# Allegro board PCB-00001382-001-V.B-0127-FAB.brd
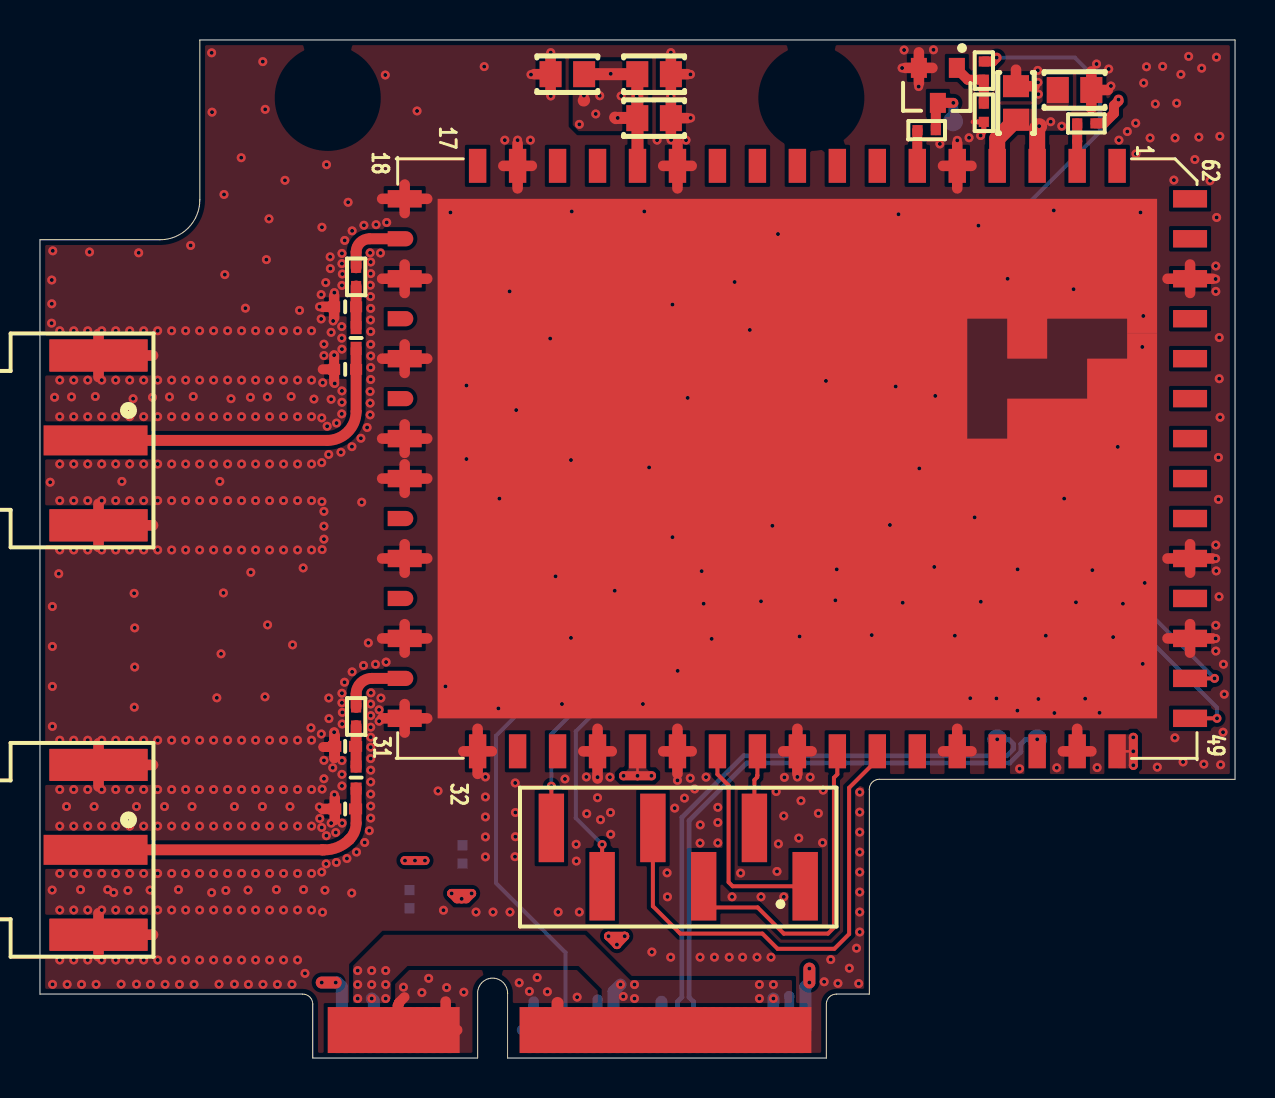
[diagram p0: board, top side]
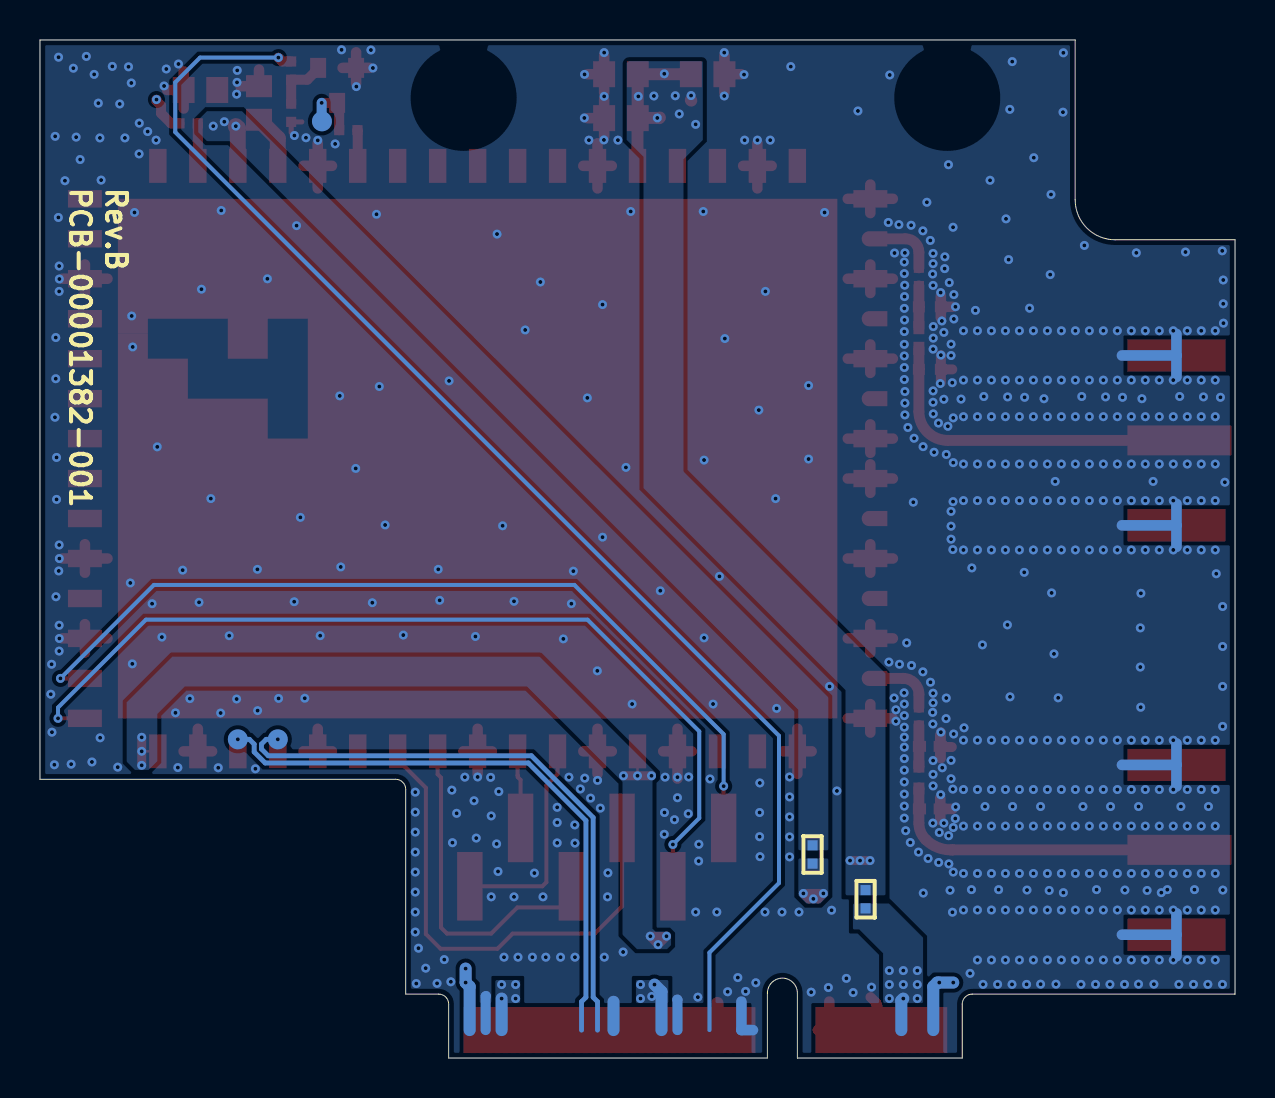
[diagram p1: board, bottom side, seen from below]

Outline 59.8 x 50.95 mm; copper layers: TOP, GND1, GND2, BOTTOM. Coordinates in mm from the lower left corner of the outline.
Outline path: 0,40.95 6,40.95 arc(7.41,41.54) 8,42.95 8,50.95 59.8,50.95 59.8,13.95 42,13.95 arc(41.65,13.8) 41.5,13.45 41.5,3.2 39.85,3.2 arc(39.5,3.05) 39.35,2.7 39.35,0 23.4,0 23.4,3.25 arc(22.65,4) 21.9,3.25 21.9,0 13.65,0 13.65,2.7 arc(13.5,3.05) 13.15,3.2 0,3.2 0,40.95

## Design rules (mm)
net group USB_LINES: nets M_USB_D_N TO P36 M_USB_D_P TO P38

## Placement (name value [footprint] x y rotation side)
C1  0.3pF  [C0402]  15.82 14.04 270 top
C15  47uF  [C0805]  48.84 47.8 90 top
C16  47uF  [C0805]  51.77 48.45 0 top
C17  47uF  [C0805]  26.39 49.24 180 top
C18  47uF  [C0805]  30.73 49.24 0 top
C19  0.1uF  [C0805]  30.73 47.04 0 top
C20  47uF  [C0402]  15.27 37.6 180 top
C21  47uF  [C0402]  15.27 34.47 180 top
J1  PCIe Egde  [MINI_PCI_MOLEX]  22.65 1.4 0 top
J2  SMA 142-0701-801  [TH_062_SMA]  2.93 30.91 270 top
J3  SMA 142-0701-801  [TH_062_SMA]  2.93 10.42 270 top
J4  6 x 0.1"  [CONN-6-SMT-100MIL]  31.94 10.06 180 top
L1  2.2nH  [L0402]  15.82 36.04 270 top
L2  0.8nH  [L0402]  15.27 15.6 0 top
L3  Load 0 Ohm R  [L0402]  15.27 12.47 0 top
NOREF  -  []  22.68 4 0 top
NOREF#2  -  []  13.65 0 90 top
NOREF#3  -  []  0 3.2 0 top
NOREF#4  -  []  41.64 13.8 0 top
NOREF#5  -  []  -151.59 -123.07 0 top
NOREF#6  -  []  -37.11 -67.94 0 top
NOREF#7  -  []  39.35 0 0 top
NOREF#8  -  []  -31.36 -69.15 0 top
NOREF#9  -  []  0 40.95 0 top
Q1  IRLML2402  [SOT23T02]  44.93 48.68 180 top
R1  0  [R0402]  52.36 46.78 180 top
R3  100K  [R0402]  47.23 47.31 270 top
R4  DNS  [R0402]  44.37 46.44 180 top
R5  0  [R0402]  47.23 49.42 270 top
R7  0  [R0402]  15.82 17.09 270 top
R8  0  [R0402]  15.82 39.09 270 top
R9  0  [R0402]  21.14 10.19 90 bottom
R10  0  [R0402]  18.49 7.95 270 bottom
TP04  -  [TP]  45.69 46.88 180 bottom
TP5  -  [TP]  49.9 15.95 180 bottom
TP6  -  [TP]  47.9 15.95 180 bottom
U1  MK5  [MK5_COHDA]  37.9 30 270 top

## Library data of the parts
C1 = Cap 1206 10uf 35V Cer: User Part Number: pn
C15-C19 = Cap 1206 10uf 35V Cer
C20 C21 = Cap 0402 2.4pf NPO Cer: User Part Number: pn
J1 = PCIe Egde
J2 J3 = RCA JACK_2: User Part Number: pn
J4 = 6 HEADER - 100mil: User Part Number: pn
L1-L3 = INDUCTOR_3: User Part Number: pn
Q1 = IRLML2402: User Part Number: pn
R1 = Res 0402 5% 2.2 OHM 0_3.1W: User Part Number: PN; Tolerance: TOL
R3 = Res 0402 5% 2.2 OHM 0_6.1W: User Part Number: PN; Tolerance: TOL
R4 = Res 0402 5% 2.2 OHM 0_5.1W: User Part Number: PN; Tolerance: TOL
R5 = Res 0402 5% 1 OHM 0_1.1W: User Part Number: PN; Tolerance: TOL
R7 R8 = Res 0402 5% 2.2 OHM 0_1.1W: User Part Number: PN; Tolerance: TOL
R9 R10 = Res 0402 5% 2.2 OHM 0_2.1W: User Part Number: PN; Tolerance: TOL
TP04-TP6 = TP
U1 = MK5_01

## Footprints (pads in the part's own frame, mm; a bottom-side part is the same pattern mirrored in y, then rotated)
C0402
  rect 0.6x0.55 smd: 1(-0.55,0) 2(0.55,0)
C0805
  rect 1.1x1.3 smd: 1(-0.84,0) 2(0.84,0)
CONN-6-SMT-100MIL
  rect 1.27x3.43 smd: 1(-6.35,1.46) 2(-3.81,-1.46) 3(-1.27,1.46) 4(1.27,-1.46) 5(3.81,1.46) 6(6.35,-1.46)
L0402
  rect 0.66x0.55 smd: 1(-0.52,0) 2(0.52,0)
MINI_PCI_MOLEX
  rect 0.6x2.3 smd: 1(-7.95,0) 2(-7.55,0) 3(-7.15,0) 4(-6.75,0) 5(-6.35,0) 6(-5.95,0) 7(-5.55,0) 8(-5.15,0) 9(-4.75,0) 10(-4.35,0) 11(-3.95,0) 12(-3.55,0) 13(-3.15,0) 14(-2.75,0) 15(-2.35,0) 16(-1.95,0) 17(1.65,0) 18(2.05,0) 19(2.45,0) 20(2.85,0) 21(3.25,0) 22(3.65,0) 23(4.05,0) 24(4.45,0) 25(4.85,0) 26(5.25,0) 27(5.65,0) 28(6.05,0) 29(6.45,0) 30(6.85,0) 31(7.25,0) 32(7.65,0) 33(8.05,0) 34(8.45,0) 35(8.85,0) 36(9.25,0) 37(9.65,0) 38(10.05,0) 39(10.45,0) 40(10.85,0) 41(11.25,0) 42(11.65,0) 43(12.05,0) 44(12.45,0) 45(12.85,0) 46(13.25,0) 47(13.65,0) 48(14.05,0) 49(14.45,0) 50(14.85,0) 51(15.25,0) 52(15.65,0)
MK5_COHDA
  rect 1.7x0.87 smd: 1(-14.65,16) 2(-14.65,14) 3(-14.65,12) 4(-14.65,10) 5(-14.65,8) 6(-14.65,6) 7(-14.65,4) 8(-14.65,2) 9(-14.65,0) 10(-14.65,-2) 11(-14.65,-4) 12(-14.65,-6) 13(-14.65,-8) 14(-14.65,-10) 15(-14.65,-12) 16(-14.65,-14) 17(-14.65,-16) 32(14.65,-16) 33(14.65,-14) 34(14.65,-12) 35(14.65,-10) 36(14.65,-8) 37(14.65,-6) 38(14.65,-4) 39(14.65,-2) 40(14.65,0) 41(14.65,2) 42(14.65,4) 43(14.65,6) 44(14.65,8) 45(14.65,10) 46(14.65,12) 47(14.65,14) 48(14.65,16)
  rect 0.87x1.7 smd: 18(-13,-19.65) 20(-9,-19.65) 22(-5,-19.65) 24(-1,-19.65) 25(1,-19.65) 27(5,-19.65) 29(9,-19.65) 31(13,-19.65) 49(13,19.65) 50(11,19.65) 51(9,19.65) 52(7,19.65) 53(5,19.65) 54(3,19.65) 55(1,19.65) 56(-1,19.65) 57(-3,19.65) 58(-5,19.65) 59(-7,19.65) 60(-9,19.65) 61(-11,19.65) 62(-13,19.65)
  custom 0.76x1.28 smd: 19(-11,-19.86) 21(-7,-19.86) 23(-3,-19.86) 26(3,-19.86) 28(7,-19.86) 30(11,-19.86)
  custom 26x36 smd: 63(0,0)
R0402
  rect 0.508x0.508 smd: 1(-0.457,0) 2(0.457,0)
SOT23T02
  rect 0.8x1 smd: 1(-0.95,-0.875) 2(0.95,-0.875) 3(0,0.875)
TH_062_SMA
  rect 1.5x5.2 smd: 1(0,-0.15)
  rect 1.6x4.9 smd: 2(-4.25,0) 3(4.25,0) 4(-4.25,0) 5(4.25,0)
TP
  round 1 smd: 1(0,0)

## Nets
3V3 TO P3,4: J1.2 J1.52 R9.1
5V0 TO P13,36, 48: C17.1 C18.1 C19.1 R10.1 U1.13(5V0_PA1) U1.36(5V0_PA2) U1.48(M_USB_VBUS)
GND: C15.2 C16.2 C17.2 C18.2 C19.2 C20.2 C21.2 J1.9 J1.15 J1.18 J1.21 J1.26 J1.34 J1.50 J2.2(SHIELD) J2.3(SHIELD#3) J2.4(SHIELD#4) J2.5(SHIELD#5) J3.2(SHIELD) J3.3(SHIELD#3) J3.4(SHIELD#4) J3.5(SHIELD#5) L2.1 L3.1 Q1.2(S) R3.2 U1.5 U1.12 U1.16 U1.18 U1.20 U1.22 U1.24 U1.25 U1.27 U1.29 U1.31 U1.32 U1.35 U1.37 U1.40 U1.44 U1.47 U1.51 U1.53 U1.60 U1.63(EXT PAD)
M_USB_D_N TO P36: J1.36 TP6.1 U1.45(M_USB_D_N)
M_USB_D_P TO P38: J1.38 TP5.1 U1.46(M_USB_D_P)
N07266: R1.2 U1.2(M_RST_N)
N07322: C15.1 C16.1 R9.2 U1.3(3V3_DIG1) U1.4(3V3_DIG2)
N15566: C20.1 L1.1 R8.2
N27947: J1.6 J1.28 J1.48 R10.2
N31801: R4.2 U1.6(PS_EN)
N32888: J1.22 R5.1
N35447: Q1.3(D) R1.1 R4.1 TP04.1
N42992: J4.1 U1.38(M_SPI_MOSI)
N43002: J4.2 U1.39(M_SPI_SCK)
N43006: J4.3 U1.41(M_SPI_MISO)
N43010: J4.4 U1.42(M_SPI_CS)
N43018: J4.5 U1.49(UART1_RX)
N43030: J4.6 U1.50(UART1_TX)
N50626: C1.1 L2.2 R7.2
N64658: Q1.1(G) R3.1 R5.2
N72226: R8.1 U1.19(5V0_ANT1)
N72235: R7.1 U1.30(RF5G_ANT2)
N73775: C21.1 J2.1(CENTER) L1.2
N75851: C1.2 J3.1(CENTER) L3.2

Pads without a net: J1 1 3 4 5 7 8 10 11 12 13 14 16 17 19 20 23 24 25 27 29 30 31 32 33 35 37 39 40 41 42 43 44 45 46 47 49 51; U1 1 7 8 9 10 11 14 15 17 21 23 26 28 33 34 43 52 54 55 56 57 58 59 61 62

## Via types
v1: diameter 0.45, hole 0.2, TOP to BOTTOM, 724 vias

## Routing (per net, layer and track width the routed paths; a pad name or vN(x,y) marks a point on that pad's centre or on a via; arc(x,y) is an arc through that point)
3V3 TO P3,4: length 16.1
  TOP w0.45: 21.33,7.97 v1(21.1,7.97) 20.87,7.97 v1(20.6,8.24) v1(21.6,8.24) 21.33,7.97
  TOP w0.6: v1(14.8,3.78) v1(14.1,3.78) ; v1(38.5,4.48) v1(38.5,3.78)
  GND1 w0.6: v1(14.8,3.78) v1(14.1,3.78) ; v1(38.5,3.78) v1(38.5,4.48)
  GND1 w1: 38.5,5.52 v1(38.5,4.48)
  GND2 w0.45: v1(20.6,8.24) 20.87,7.97 v1(21.1,7.97) 21.33,7.97 v1(21.6,8.24) v1(20.6,8.24)
  GND2 w0.6: v1(14.8,3.78) v1(14.1,3.78) ; v1(38.5,4.48) v1(38.5,3.78)
  BOTTOM w0.6: v1(38.5,4.48) v1(38.5,3.78) 38.3,3.58 J1.52 ; v1(14.1,3.78) v1(14.8,3.78) 14.9,3.78 15.1,3.58 J1.2
5V0 TO P13,36, 48: length 24.7
  TOP w0.127: U1.36 v1(29.9,14.12) ; U1.48 v1(54.71,15.35)
  TOP w0.2: 29.89,14.13 v1(29.9,14.12)
  TOP w0.45: v1(19.26,9.88) v1(18.76,9.88) v1(18.26,9.88) ; v1(29.2,14.12) v1(29.9,14.12) v1(30.6,14.12) ; v1(54.71,16.05) v1(54.71,15.35) v1(54.71,14.65) ; v1(28.87,5.68) v1(28.45,6.1) v1(29.26,6.1) v1(28.87,5.68)
  TOP w0.6: 28.78,47.07 28.81,47.04 ; 27.21,47.92 27.23,47.94 ; C19.1 C18.1 C17.1 ; C19.1 29.88,47.05 v1(28.91,47.05) ; C19.1 29.9,47.03 U1.13
  GND1 w0.45: v1(54.71,16.05) v1(54.71,15.35) v1(54.71,14.65) ; v1(30.6,14.12) v1(29.9,14.12) v1(29.2,14.12)
  GND2 w0.45: v1(54.71,16.05) v1(54.71,15.35) v1(54.71,14.65) ; v1(30.6,14.12) v1(29.9,14.12) v1(29.2,14.12) ; v1(19.26,9.88) v1(18.76,9.88) v1(18.26,9.88) ; v1(29.26,6.1) v1(28.87,5.68) v1(28.45,6.1) v1(29.26,6.1)
  vias: v1(26.99,46.73) v1(27.22,48.17) v1(27.81,47.25) v1(28.01,48.16) v1(28.56,49.26) v1(29.08,48.15) v1(29.86,48.13)
GND: length 147.2
  TOP w0.254: 47.23,46.32 R3.2 46.7,46.85
  TOP w0.5: C21.2 v1(14.72,35.18) ; C21.2 14.15,34.47 ; C21.2 14.72,33.81 ; 14.17,15.56 14.69,15.56 14.72,15.6 ; 14.72,15.6 14.72,15 ; 14.72,15.6 v1(14.72,16.31) ; J1.9 17.9,2.62 17.95,2.67 17.95,2.74 17.97,2.76 17.97,2.78 18.24,3.05
  TOP w0.527: J3.2 2.93,15.75 ; J3.2 2.93,13.59 ; J3.2 5.66,14.67 ; C19.2 31.57,47.96 ; C19.2 32.4,47.04 ; C19.2 31.57,46.11 ; 14.75,16.15 L2.1 14.75,15.04 ; U1.16 24.61,44.65 ; U1.16 23.19,44.65 ; U1.16 23.9,45.78 ; U1.16 23.9,43.52 ; J2.2 2.93,36.24 ; J2.2 5.66,35.16 ; J2.2 2.93,34.08 ; U1.51 57.55,21.71 ; U1.51 57.55,20.29 ; U1.51 56.42,21 ; U1.51 58.68,21 ; 14.14,12.47 L3.1 ; L3.1 14.75,11.91 ; L3.1 14.75,13.02 ; U1.40 37.9,16.48 ; U1.40 37.19,15.35 ; U1.40 37.9,14.22 ; U1.40 38.61,15.35 ; 17.12,43 U1.18 ; U1.18 19.38,43 ; U1.18 18.25,42.29 ; U1.18 18.25,43.71 ; 2.93,25.58 J2.3 ; J2.3 5.66,26.66 ; J2.3 2.93,27.74 ; 18.25,20.29 U1.29 ; U1.29 19.38,21 ; U1.29 17.12,21 ; U1.29 18.25,21.71 ; 17.12,25 U1.27 ; U1.27 19.38,25 ; U1.27 18.25,24.29 ; U1.27 18.25,25.71 ; 17.12,29 U1.25 ; U1.25 18.25,28.29 ; U1.25 18.25,29.71 ; U1.25 19.38,29 ; C16.2 52.61,49.37 ; C16.2 52.61,47.52 ; C16.2 53.44,48.45 ; U1.31 19.38,17 ; U1.31 18.25,16.29 ; U1.31 18.25,17.71 ; U1.31 17.12,17 ; U1.32 22.61,15.35 ; U1.32 21.19,15.35 ; U1.32 21.9,14.22 ; U1.32 21.9,16.48 ; 57.55,24.29 U1.53 ; U1.53 57.55,25.71 ; U1.53 56.42,25 ; U1.53 58.68,25 ; U1.35 28.61,15.35 ; U1.35 27.9,16.48 ; U1.35 27.19,15.35 ; U1.35 v1(27.9,14.06) 27.9,13.99 ; 57.55,38.29 U1.60 ; U1.60 56.42,39 ; U1.60 58.68,39 ; U1.60 57.55,39.71 ; 18.25,34.29 U1.22 ; U1.22 18.25,35.71 ; U1.22 17.12,35 ; U1.22 19.38,35 ; 31.57,48.31 C18.2 ; C18.2 32.4,49.24 ; C18.2 31.57,50.16 ; 31.9,14.22 U1.37 ; U1.37 31.9,16.48 ; U1.37 32.61,15.35 ; U1.37 31.19,15.35 ; U1.12 31.9,45.78 ; U1.12 31.9,43.52 ; U1.12 32.61,44.65 ; U1.12 31.19,44.65 ; U1.20 19.38,39 ; U1.20 18.25,39.71 ; U1.20 18.25,38.29 ; U1.20 17.12,39 ; C20.2 14.72,38.15 ; C20.2 14.72,37.04 ; C20.2 14.14,37.6 ; 20.25,23.34 20.3,23.34 ; U1.24 19.38,31 ; U1.24 18.25,31.71 ; U1.24 18.25,30.29 ; U1.24 17.12,31 ; 45.9,43.52 U1.5 ; U1.5 45.9,45.78 ; U1.5 46.61,44.65 ; U1.5 45.19,44.65 ; U1.47 52.61,15.35 ; U1.47 51.19,15.35 ; U1.47 51.9,16.48 ; 43.3,49.55 Q1.2 ; Q1.2 44.66,49.55 ; Q1.2 43.98,50.33 ; Q1.2 43.98,48.78 ; 49.77,48.64 C15.2 48.84,49.46 ; J3.3 2.93,7.25 ; J3.3 5.66,6.17 ; J3.3 2.93,5.09 ; C17.2 25.55,50.16 ; C17.2 25.55,48.31 ; C17.2 24.72,49.24 ; 20.3,2.83 J1.15 20.88,1.4 ; 45.19,15.35 U1.44 ; U1.44 45.9,16.48 ; U1.44 46.61,15.35
  TOP w0.6: J1.21 25.9,2.76
  BOTTOM w0.5: 27.91,2.93 27.9,2.92 J1.26 ; J1.50 37.5,3.09 37.48,3.11
  BOTTOM w0.527: J2.2 5.66,35.16 ; J2.2 2.93,36.24 ; J2.2 2.93,34.08 ; J3.2 5.66,14.67 ; J3.2 2.93,13.59 ; J3.2 2.93,15.75 ; J2.3 2.93,27.74 ; J2.3 2.93,25.58 ; J2.3 5.66,26.66 ; 2.93,5.09 J3.3 ; J3.3 2.93,7.25 ; J3.3 5.66,6.17 ; 24.12,1.4 J1.18 24.7,2.83
  BOTTOM w0.6: J1.34 31.1,2.82
  vias: v1(0.51,28.82) v1(0.59,38.94) v1(0.59,37.75) v1(0.58,36.78) v1(0.62,22.6) v1(0.62,20.6) v1(0.62,18.6) v1(0.62,16.6) v1(0.61,8.41) v1(0.64,40.4) v1(0.63,3.69) v1(0.73,33.07) v1(0.99,36.4) v1(0.99,33.93) v1(0.99,32.1) v1(0.99,29.73) v1(0.99,27.9) v1(0.99,25.43) v1(0.94,24.24) v1(0.99,15.91) v1(0.99,13.44) v1(0.99,11.61) v1(0.99,9.24) v1(0.99,7.41) v1(0.99,4.91) v1(1.33,12.59) v1(1.36,3.69) v1(1.58,33.09) v1(1.69,36.4) v1(1.69,33.93) v1(1.69,32.1) v1(1.69,29.73) v1(1.69,27.9) v1(1.69,25.43) v1(1.69,15.91) v1(1.69,13.44) v1(1.69,11.61) v1(1.69,9.24) v1(1.69,7.41) v1(1.69,4.91) v1(2.03,8.43) v1(2.08,3.69) v1(2.39,36.4) v1(2.39,33.93) v1(2.39,32.1) v1(2.39,29.73) v1(2.39,27.9) v1(2.39,25.43) v1(2.39,15.91) v1(2.39,13.44) v1(2.39,11.61) v1(2.39,9.24) v1(2.39,7.41) v1(2.39,4.91) v1(2.48,40.34) v1(2.71,12.59) v1(2.77,33.11) v1(2.81,3.69) v1(3.09,36.4) v1(3.09,33.93) v1(3.09,32.1) v1(3.09,29.73) v1(3.09,27.9) v1(3.09,25.43) v1(3.09,15.91) v1(3.09,13.44) v1(3.09,11.61) v1(3.09,9.24) v1(3.09,7.41) v1(3.09,4.91) v1(3.39,8.43) v1(3.69,8.28) v1(3.79,36.4) v1(3.79,33.93) v1(3.79,32.1) v1(3.79,29.73) v1(3.79,27.9) v1(3.79,25.43) v1(3.79,15.91) v1(3.79,13.44) v1(3.79,11.61) v1(3.79,9.24) v1(3.79,7.41) v1(3.79,4.91) v1(4.1,28.86) v1(4.06,3.7) v1(4.4,8.39) v1(4.49,36.4) v1(4.49,33.93) v1(4.49,32.1) v1(4.49,29.73) v1(4.49,27.9) v1(4.49,25.43) v1(4.49,15.91) v1(4.49,13.44) v1(4.49,11.61) v1(4.49,9.24) v1(4.49,7.41) v1(4.49,4.91) v1(4.66,33) v1(4.71,23.26) v1(4.74,21.53) v1(4.74,19.57) v1(4.72,17.56) v1(4.83,12.59) v1(4.83,3.7) v1(4.94,40.3) v1(5.19,36.4) v1(5.19,33.93) v1(5.19,32.1) v1(5.19,29.73) v1(5.19,27.9) v1(5.19,25.43) v1(5.19,15.91) v1(5.19,13.44) v1(5.19,11.61) v1(5.19,9.24) v1(5.19,7.41) v1(5.19,4.91) v1(5.51,8.41) v1(5.53,3.69) v1(5.63,33.07) v1(5.89,36.4) v1(5.89,33.93) v1(5.89,32.1) v1(5.89,29.73) v1(5.89,27.9) v1(5.89,25.43) v1(5.89,15.91) v1(5.89,13.44) v1(5.89,11.61) v1(5.89,9.24) v1(5.89,7.41) v1(5.89,4.91) v1(6.23,12.59) v1(6.26,3.69) v1(6.48,33.09) v1(6.59,36.4) v1(6.59,33.93) v1(6.59,32.1) v1(6.59,29.73) v1(6.59,27.9) v1(6.59,25.43) v1(6.59,15.91) v1(6.59,13.44) v1(6.59,11.61) v1(6.59,9.24) v1(6.59,7.41) v1(6.59,4.91) v1(6.93,8.43) v1(6.98,3.69) v1(7.29,36.4) v1(7.29,33.93) v1(7.29,32.1) v1(7.29,29.73) v1(7.29,27.9) v1(7.29,25.43) v1(7.29,15.91) v1(7.29,13.44) v1(7.29,11.61) v1(7.29,9.24) v1(7.29,7.41) v1(7.29,4.91) v1(7.54,40.67) v1(7.61,12.59) v1(7.67,33.11) v1(7.71,3.69) v1(7.99,36.4) v1(7.99,33.93) v1(7.99,32.1) v1(7.99,29.73) v1(7.99,27.9) v1(7.99,25.43) v1(7.99,15.91) v1(7.99,13.44) v1(7.99,11.61) v1(7.99,9.24) v1(7.99,7.41) v1(7.99,4.91) v1(8.59,50.31) v1(8.61,47.34) v1(8.59,8.28) v1(8.69,36.4) v1(8.69,33.93) v1(8.69,32.1) v1(8.69,29.73) v1(8.69,27.9) v1(8.69,25.43) v1(8.69,15.91) v1(8.69,13.44) v1(8.69,11.61) v1(8.69,9.24) v1(8.69,7.41) v1(8.69,4.91) v1(8.85,18.03) v1(9,28.86) v1(8.96,3.7) v1(9.06,20.23) v1(9.21,43.22) v1(9.18,23.28) v1(9.25,39.21) v1(9.3,8.39) v1(9.39,36.4) v1(9.39,33.93) v1(9.39,32.1) v1(9.39,29.73) v1(9.39,27.9) v1(9.39,25.43) v1(9.39,15.91) v1(9.39,13.44) v1(9.39,11.61) v1(9.39,9.24) v1(9.39,7.41) v1(9.39,4.91) v1(9.56,33) v1(9.73,12.59) v1(9.73,3.7) v1(10.07,45.06) v1(10.09,36.4) v1(10.09,33.93) v1(10.09,32.1) v1(10.09,29.73) v1(10.09,27.9) v1(10.09,25.43) v1(10.09,15.91) v1(10.09,13.44) v1(10.09,11.61) v1(10.09,9.24) v1(10.09,7.41) v1(10.09,4.91) v1(10.28,37.53) v1(10.41,8.41) v1(10.43,3.69) v1(10.53,33.07) v1(10.55,24.31) v1(10.79,36.4) v1(10.79,33.93) v1(10.79,32.1) v1(10.79,29.73) v1(10.79,27.9) v1(10.79,25.43) v1(10.79,15.91) v1(10.79,13.44) v1(10.79,11.61) v1(10.79,9.24) v1(10.79,7.41) v1(10.79,4.91) v1(11.15,49.87) v1(11.13,12.59) v1(11.16,3.69) v1(11.27,47.48) v1(11.26,18.08) v1(11.33,39.96) v1(11.38,33.09) v1(11.39,21.68) v1(11.46,42) v1(11.49,36.4) v1(11.49,33.93) v1(11.49,32.1) v1(11.49,29.73) v1(11.49,27.9) v1(11.49,25.43) v1(11.49,15.91) v1(11.49,13.44) v1(11.49,11.61) v1(11.49,9.24) v1(11.49,7.41) v1(11.49,4.91) v1(11.83,8.43) v1(11.88,3.69) v1(12.19,36.4) v1(12.19,33.93) v1(12.19,32.1) v1(12.19,29.73) v1(12.19,27.9) v1(12.19,25.43) v1(12.19,15.91) v1(12.19,13.44) v1(12.19,11.61) v1(12.19,9.24) v1(12.19,7.41) v1(12.19,4.91) v1(12.26,43.93) v1(12.51,12.59) v1(12.57,33.11) v1(12.61,3.69) v1(12.64,20.68) v1(12.89,36.4) v1(12.89,33.93) v1(12.89,32.1) v1(12.89,29.73) v1(12.89,27.9) v1(12.89,25.43) v1(12.89,15.91) v1(12.89,13.44) v1(12.89,11.61) v1(12.89,9.24) v1(12.89,7.41) v1(12.89,4.91) v1(12.99,37.42) v1(13.17,24.53) v1(13.19,8.43) v1(13.26,4.24) v1(13.59,36.4) v1(13.59,33.93) v1(13.59,32.1) v1(13.59,29.73) v1(13.59,27.9) v1(13.59,25.43) v1(13.56,16.53) v1(13.59,15.91) v1(13.59,13.44) v1(13.59,11.61) v1(13.59,9.24) v1(13.59,7.41) v1(13.71,32.98) v1(13.99,37.6) v1(13.98,12.57) v1(14,11.99) v1(14.11,41.58) v1(14.07,38.21) v1(14.07,36.99) v1(14.1,32.04) v1(14.1,29.8) v1(14.11,27.85) v1(14.12,25.45) v1(14.08,16.22) v1(14.12,13.46) v1(14.1,11.54) v1(14.1,9.31) v1(14.21,35.73) v1(14.21,35.16) v1(14.15,33.8) v1(14.21,27.36) v1(14.21,26.62) v1(14.21,25.97) v1(14.21,14.9) v1(14.21,13.98) v1(14.14,7.3) v1(14.3,38.81) v1(14.26,8.4) v1(14.34,44.71) v1(14.37,31.62) v1(14.33,11.13) v1(14.32,9.72) v1(14.52,40.1) v1(14.45,30.21) v1(14.45,18.02) v1(14.46,16.99) v1(14.53,39.51) v1(14.57,36.32) v1(14.57,32.97) v1(14.57,11.76) v1(14.67,36.89) v1(14.65,14.53) v1(14.73,38.31) v1(14.75,33.76) v1(14.73,13.18) v1(14.8,11.29) v1(14.84,31.78) v1(14.83,9.79) v1(15.11,40.27) v1(15.11,39.76) v1(15.11,38.67) v1(15.1,36.61) v1(15.1,36.03) v1(15.11,35.48) v1(15.11,33.39) v1(15.11,32.82) v1(15.1,32.24) v1(15.06,30.32) v1(15.11,18.26) v1(15.11,17.78) v1(15.12,16.72) v1(15.11,14.89) v1(15.11,14.2) v1(15.11,13.62) v1(15.12,11.76) v1(15.13,39.24) v1(15.13,17.3) v1(15.25,40.92) v1(15.24,18.81) v1(15.36,9.99) v1(15.42,42.83) v1(15.62,41.4) v1(15.61,30.6) v1(15.62,19.33) v1(15.6,8.26) v1(15.84,10.31) v1(16.06,31.02) v1(16.1,27.82) v1(16.21,41.68) v1(16.19,19.65) v1(16.25,10.79) v1(16.37,31.56) v1(16.52,40.3) v1(16.52,33.36) v1(16.52,32.78) v1(16.52,32.19) v1(16.43,20.78) v1(16.48,11.38) v1(16.55,39.84) v1(16.55,39.26) v1(16.53,38.68) v1(16.54,38.11) v1(16.55,37.52) v1(16.54,36.94) v1(16.55,36.36) v1(16.55,35.72) v1(16.55,35.14) v1(16.55,34.56) v1(16.55,33.96) v1(16.56,18.28) v1(16.55,17.72) v1(16.55,17.14) v1(16.55,16.56) v1(16.55,16.06) v1(16.55,15.56) v1(16.55,14.99) v1(16.55,14.41) v1(16.55,13.82) v1(16.55,13.21) v1(16.55,12.61) v1(16.55,12.01) v1(16.79,19.71) v1(16.82,41.71) v1(16.97,17.43) v1(16.97,16.86) v1(17.04,40.29) v1(17.06,18.02) v1(17.28,49.2) v1(17.35,41.82) v1(17.32,19.82) v1(18.19,3.55) v1(18.87,47.4) v1(19.11,3.28) v1(19.45,3.99) v1(19.92,13.37) v1(20.19,7.4) v1(20.29,18.6) v1(20.35,3.53) v1(20.54,42.32) v1(21.21,3.3) v1(21.34,33.66) v1(21.34,29.98) v1(21.82,7.31) v1(22.23,49.62) v1(22.29,14.07) v1(22.29,13.07) v1(22.29,12.07) v1(22.29,11.07) v1(22.29,10.07) v1(22.67,7.31) v1(22.99,28) v1(22.94,17.5) v1(23.26,45.94) v1(23.5,38.37) v1(23.52,7.31) v1(23.78,13.77) v1(23.79,12.29) v1(23.79,11.08) v1(23.77,10.08) v1(23.9,45.94) v1(23.83,32.43) v1(23.98,3.77) v1(24.49,3.34) v1(24.57,49.22) v1(24.54,45.94) v1(24.88,4.03) v1(25.39,3.32) v1(25.56,50.32) v1(25.56,48.15) v1(25.53,36.01) v1(25.8,24.11) v1(25.93,7.31) v1(26.12,17.72) v1(26.27,13.97) v1(26.61,42.37) v1(26.57,29.93) v1(26.57,21.03) v1(26.83,10.7) v1(26.84,9.86) v1(26.88,3.05) v1(26.99,7.31) v1(27.34,14.07) v1(27.36,12.23) v1(27.9,13.03) v1(28.05,11.93) v1(28.52,14.06) v1(28.55,12.29) v1(28.56,11.2) v1(28.76,23.39) v1(30.17,17.72) v1(30.24,42.37) v1(30.48,29.56) v1(30.62,5.31) v1(30.88,45.94) v1(31.38,9.27) v1(31.4,8.07) v1(31.57,50.32) v1(31.57,48.13) v1(31.58,45.95) v1(31.56,5.05) v1(31.65,37.71) v1(31.65,26.07) v1(31.76,12.51) v1(31.91,19.38) v1(31.9,13.9) v1(32.25,13.01) v1(32.33,45.94) v1(32.41,33.04) v1(32.55,49.23) v1(32.56,47.05) v1(32.54,14.01) v1(32.76,13.47) v1(33.11,24.37) v1(33.04,11.67) v1(33.03,10.76) v1(33.03,5.05) v1(33.21,22.74) v1(33.33,14.06) v1(33.61,20.98) v1(33.75,5.05) v1(33.92,12.55) v1(33.92,11.79) v1(33.92,10.77) v1(34.49,5.05) v1(34.63,8.07) v1(34.76,38.84) v1(35.06,9.26) v1(35.16,5.05) v1(35.52,36.44) v1(35.88,5.05) v1(36.08,22.86) v1(36.08,8.07) v1(36.58,5.05) v1(36.65,26.64) v1(36.84,13.34) v1(36.88,9.34) v1(36.93,41.24) v1(36.95,10.72) v1(37.25,14.05) v1(37.22,12.12) v1(37.22,8.07) v1(37.9,14.07) v1(38.01,21.1) v1(37.97,11.01) v1(38.08,12.88) v1(38.54,14.06) v1(38.95,12.25) v1(39.19,13.41) v1(39.16,10.78) v1(39.24,3.82) v1(39.33,33.89) v1(39.57,4.93) v1(39.8,22.91) v1(39.87,24.46) v1(39.93,3.74) v1(40.5,4.5) v1(40.86,5.5) v1(41.02,13.31) v1(41.02,12.31) v1(41.02,11.31) v1(41.02,10.31) v1(41.02,9.31) v1(41.02,8.31) v1(41.02,7.31) v1(41.02,6.31) v1(40.97,3.73) v1(41.62,21.17) v1(42.53,26.68) v1(42.82,33.61) v1(42.96,42.23) v1(43.14,49.55) v1(43.17,22.79) v1(43.24,50.45) v1(43.97,48.62) v1(44,29.51) v1(44.71,50.46) v1(44.8,33.14) v1(44.75,24.58) v1(45.03,45.75) v1(45.78,21.14) v1(45.9,45.93) v1(46.49,46.06) v1(46.55,18.01) v1(46.77,27.06) v1(46.96,41.66) v1(47.07,46.17) v1(47.08,22.84) v1(47.86,18) v1(48.42,39) v1(48.92,24.46) v1(48.91,17.39) v1(49.02,14.48) v1(49.93,49.43) v1(49.94,48.83) v1(49.96,48.24) v1(49.96,17.97) v1(50.33,21.14) v1(50.73,42.42) v1(50.76,17.27) v1(50.88,14.53) v1(51.25,28) v1(51.72,38.48) v1(51.84,22.81) v1(52.3,17.99) v1(52.66,24.42) v1(52.87,49.75) v1(52.9,14.54) v1(53.02,17.28) v1(53.48,49.5) v1(53.59,48.65) v1(53.7,21.07) v1(53.99,45.94) v1(53.93,30.59) v1(54.19,22.74) v1(54.41,46.37) v1(54.83,46.79) v1(54.84,45.25) v1(55.07,42.32) v1(55.21,37.14) v1(55.16,35.59) v1(55.18,19.73) v1(55.23,48.8) v1(55.28,23.78) v1(55.37,49.61) v1(55.55,46.05) v1(55.81,47.75) v1(55.91,14.56) v1(56.18,49.63) v1(56.8,46.05) v1(56.74,43.94) v1(56.79,16.03) v1(56.88,47.79) v1(57.09,49.23) v1(57.2,14.82) v1(57.48,50.13) v1(57.79,44.97) v1(57.99,46.09) v1(58.13,49.54) v1(58.24,14.71) v1(58.55,43.91) v1(58.87,50.09) v1(58.88,42.07) v1(58.84,39.64) v1(58.83,38.99) v1(58.84,38.37) v1(58.84,25.68) v1(58.83,25) v1(58.86,24.38) v1(58.84,21.66) v1(58.83,21) v1(58.84,20.37) v1(59.01,36.06) v1(59.01,34) v1(58.97,30.06) v1(58.97,27.96) v1(59,23.09) v1(59.04,46.13) v1(59.05,32.07) v1(59.08,14.68) v1(59.2,16.31) v1(59.22,19.71) v1(59.26,18.21)
M_USB_D_N TO P36: length 29.9
  BOTTOM w0.241: v1(47.9,15.95) 48.48,15.95 48.72,15.71 48.72,15.47 48.38,15.13 35.21,15.13 32.12,12.04 32.12,3.04 31.9,2.82 J1.36
M_USB_D_P TO P38: length 29.9
  BOTTOM w0.241: J1.38 32.7,2.82 32.48,3.04 32.48,11.89 35.36,14.76 48.53,14.76 49.08,15.32 49.08,15.71 49.32,15.95 v1(49.9,15.95)
N07266: length 2.1
  TOP w0.5: R1.2 51.9,45.88 51.9,45.88 U1.2
N07322: length 4.7
  TOP w0.8: U1.4 47.9,46.02 C15.1 ; U1.3 49.9,46.54 v1(50,46.64)
  vias: v1(50.58,46.86) v1(51.13,46.64)
N15566: length 2.1
  TOP w0.546: R8.2 C20.1 L1.1
N27947: length 5.6
  BOTTOM w0.6: J1.28 28.7,3.33 v1(29.05,3.68) ; v1(16.6,2.98) 16.7,2.88 J1.6 ; J1.48 v1(36.7,2.98)
  vias: v1(15.9,4.38) v1(15.9,3.68) v1(15.9,2.98) v1(16.6,4.38) v1(16.6,3.68) v1(17.3,4.38) v1(17.3,3.68) v1(17.3,2.98) v1(29.18,3.08) v1(29.75,3.68) v1(29.75,2.98) v1(36,3.68) v1(36,2.98) v1(36.7,3.68)
N31801: length 1.8
  TOP w0.5: R4.2 43.9,46.42 U1.6
N32888: length 67.8
  TOP w0.5: R5.1 47.68,49.87 v1(47.87,50.07)
  BOTTOM w0.2: J1.22 26.3,5.28 22.82,8.76 22.82,16.13 53.03,46.34 53.03,48.83 51.79,50.07 v1(47.87,50.07)
N35447: length 13.6
  TOP w0.5: R4.1 44.83,47.7 Q1.3 v1(45.7,47.8) ; R1.1 53.24,46.78 53.74,47.28 53.74,47.67 53.97,47.9 v1(53.97,47.97)
  GND2 w0.6: v1(45.7,47.8) 45.99,47.51 50.26,47.51 50.43,47.68 53.68,47.68 v1(53.97,47.97)
  BOTTOM w0.5: TP04.1 45.7,46.89 v1(45.7,47.8)
N42992: length 10.7
  TOP w0.2: U1.38 33.9,14.2 34.46,13.64 34.46,8.8 34.66,8.6 J4.1
N43002: length 3.9
  TOP w0.2: U1.39 35.9,14.15 35.89,14.14 35.89,14.06 35.75,13.92 J4.2
N43006: length 16.8
  TOP w0.2: U1.41 39.9,14.2 39.73,14.03 39.73,6.53 39.43,6.23 37.22,6.23 35.91,7.54 33.79,7.54 33.59,7.74 33.59,8.22 J4.3
N43010: length 24.7
  TOP w0.2: U1.42 41.9,14.94 40.49,13.53 40.49,6.21 39.75,5.47 36.91,5.47 36.15,6.23 32.04,6.23 30.67,7.6 J4.4
N43018: length 46.4
  TOP w0.2: J4.5 v1(28.13,10.69) ; U1.49 v1(58.9,17)
  BOTTOM w0.2: v1(28.13,10.69) 26.81,12.01 26.81,16.35 32.4,21.94 54.5,21.94 58.9,17.54 v1(58.9,17)
N43030: length 44.1
  TOP w0.2: U1.50 v1(58.77,19) ; J4.6 v1(25.59,13.61)
  BOTTOM w0.2: v1(58.77,19) 54.1,23.68 33.06,23.68 25.59,16.21 v1(25.59,13.61)
N50626: length 2.1
  TOP w0.127: 15.82,15.57 L2.2
  TOP w0.546: R7.2 C1.1 15.82,14.56
N64658: length 2.8
  TOP w0.5: 47.23,47.76 R5.2 46.43,48.96 45.88,49.51 Q1.1
N72226: length 3.4
  TOP w0.546: U1.19 16.49,41 arc(16.02,40.8) 15.82,40.33 R8.1
N72235: length 3.3
  TOP w0.546: R7.1 15.82,18.21 arc(16.05,18.77) 16.61,19 U1.30
N73775: length 17
  TOP w0.546: J2.1 14.38,30.91 arc(15.4,31.33) 15.82,32.35 C21.1 L1.2
N75851: length 15.6
  TOP w0.127: 15.82,12.5 L3.2
  TOP w0.546: J3.1 14.12,10.42 14.12,10.42 14.23,10.42 arc(14.9,10.55) 15.48,10.93 15.48,10.94 arc(15.73,11.31) 15.82,11.76 C1.2 15.82,13.52

## Copper pours and planes (outline as drawn; the poured copper is in the pictures)
3V3 TO P3,4 on BOTTOM: 20.35,9.99 20.35,8.14 20.76,7.73 21.44,7.73 21.85,8.14 21.85,9.99
3V3 TO P3,4 on GND1: 14.1,3.48 13.89,3.56 13.8,3.78 13.8,5.06 16.33,7.59 16.33,10.24 17.77,11.68 20,11.68 21.1,10.57 21.1,9.11 21.47,8.74 29.57,8.74 31.58,6.73 38.07,6.73 39,5.8 39,4.78 38.98,4.76 38,4.76 38,5.56 37.83,5.73 31.17,5.73 29.16,7.74 20.4,7.74 20.1,8.04 20.1,10.29 19.72,10.68 17.95,10.68 17.33,10.06 17.33,7.18 15.1,4.95 15.1,3.77 15.01,3.56 14.8,3.48
5V0 TO P13,36, 48 on TOP: 26.68,49.89 30.41,49.89 30.44,49.86 30.44,46.39 26.96,46.39 26.66,46.69 26.66,49.87
5V0 TO P13,36, 48 on TOP: 53.96,16.2 54.53,16.2 54.61,16.28 54.81,16.28 54.94,16.15 54.94,14.55 54.81,14.42 54.62,14.42 54.54,14.5 53.97,14.5 53.96,14.51 53.96,16.19
5V0 TO P13,36, 48 on TOP: 29.46,14.74 29.46,14.5 29.31,14.35 29.1,14.35 28.97,14.22 28.97,14.03 29.1,13.9 30.7,13.9 30.83,14.03 30.83,14.25 30.73,14.35 30.48,14.35 30.33,14.5 30.33,14.74 30.33,14.75 29.47,14.75
5V0 TO P13,36, 48 on BOTTOM: 26.63,49.83 26.65,49.87 26.69,49.89 30.3,49.89 30.4,49.85 30.44,49.75 30.44,45.95 29.6,45.11 29.6,28.52 19.49,18.41 19.49,8.15 17.49,8.15 17.49,19.25 27.6,29.36 27.6,44.98 26.63,45.95
5V0 TO P13,36, 48 on BOTTOM: 28.36,6.33 29,6.33 29.15,6.48 29.15,13.86 28.98,14.03 28.98,14.27 34.8,20.09 53.18,20.09 55.46,17.81 55.46,14.83 55.05,14.42 54.37,14.42 53.93,14.86 53.93,17.22 52.56,18.59 35.42,18.59 30.65,13.82 30.65,6.18 29.92,5.45 28.42,5.45 28.22,5.65 28.22,6.19
5V0 TO P13,36, 48 on GND1: 17.9,6.96 19.68,5.18 29.28,5.18 29.44,5.25 29.51,5.42 29.51,6.44 29.43,6.61 29.26,6.68 20.3,6.68 19.41,7.57 19.4,7.57 19.4,9.7 19.49,9.79 19.49,9.98 19.35,10.12 18.18,10.12 17.9,9.84
GND on TOP, BOTTOM, GND1, GND2: 41.24,3.46 39.85,3.46 39.31,3.24 39.09,2.7 39.09,0.26 23.66,0.26 23.66,3.25 22.65,4.26 21.64,3.25 21.64,0.26 13.91,0.26 13.91,2.7 13.69,3.24 13.15,3.46 0.26,3.46 0.26,40.69 6,40.69 7.6,41.35 8.26,42.95 8.26,50.69 59.54,50.69 59.54,14.21 42,14.21 41.46,13.99 41.24,13.45
N07322 on TOP: 50.86,49.1 50.38,49.1 50.38,47.8 50.09,47.51 48.19,47.51 48.19,46.41 51.35,46.41 51.36,46.42 51.36,47.42 51.48,47.54 51.48,49.07 51.44,49.11 50.87,49.11
N07322 on BOTTOM: 20.35,10.4 20.35,18.05 49.69,47.39 51.44,47.39 51.88,46.95 51.88,46.33 51.44,45.89 50.31,45.89 21.85,17.43 21.85,10.4
N27947 on TOP: 15.67,2.75 17.39,2.75 17.57,2.93 17.57,3.79 18.39,4.61 26.95,4.61 28.11,3.45 28.11,2.75 37.63,2.75 37.63,3.91 29.53,3.91 27.27,6.17 17.22,6.17 15.67,4.62
N27947 on BOTTOM: 35.77,2.75 35.77,3.91 37.01,3.91 37.01,2.75
N27947 on BOTTOM: 15.61,2.75 17.61,2.75 17.61,5.25 18.8,6.44 19.12,6.44 19.12,7.74 17.32,7.74 15.61,6.03
N27947 on BOTTOM: 28.36,3.91 29.98,3.91 29.98,2.75 28.36,2.75
N27947 on GND1, GND2: 35.76,3.91 35.76,2.75 37.63,2.75 37.63,3.91
N27947 on GND1, GND2: 15.69,4.62 15.69,2.74 17.53,2.74 17.53,4.62
N27947 on GND1, GND2: 28.14,3.89 28.14,2.75 29.98,2.75 29.98,3.89

## Text on the board
Ref Des/Silkscreen Bottom: Rev.B | PCB-00001382-001
User.Comments: dia | 4.90 | 6.15
XSECTION_CHART: *  SURFACE - AIR 0 MM | *  SOLDERMASK 0.013 MM | L1: TOP CONDUCTOR - BASE COPPER + PLATING 0.056 MM (0.5 oz) | *  DIELECTRIC - FR-4 0.3 MM | L2: GND1 CONDUCTOR - COPPER 0.016 MM (0.5 oz) | *  DIELECTRIC - FR-4 0.254 MM | L3: GND2 CONDUCTOR - COPPER 0.016 MM (0.5 oz) | L4: BOTTOM CONDUCTOR - BASE COPPER + PLATING 0.056 MM (0.5 oz) | DESIGN CROSS SECTION CHART | ___________________________ | TOTAL THICKNESS 1.024 MM | 1-4
PAGE_OUTLINE: L2-GND1 | L3-GND2 | BOTTOM | TOP | Layers | 0.546 | Trace | Width | (mm) | Single Ended | IMPEDANCE REQUIREMENTS (DETAIL B) | Impedance | (Ohms) | 50 | 0.241 | Differential | Space | 0.121 | 90 | Reference | Layer | L3 | L2 | STACKUP (DETAIL A) | 11. FABRICATOR SHALL APPLY DATE CAGE CODE, I.D. AND UL MARKING TO SECONDARY SIDE (WHERE IS INDICATED), MARKING TO BE IN SILKSCREEN. | 10. PCB TO BE PRODUCED WITH SILKSCREEN LEGEND ON TOP AND BOTTOM. PCB PRODUCER IS REQUIRED TO REMOVE SILKSCREEN FROM EXPOSED COPPER. | NOTES: (UNLESS OTHERWISE SPECIFIED): | 8. DIMENSIONS ARE AFTER ETCHING AND PLATING, AND ARE IN MM [MIL] IF NOT STATED OTHERWISE. | 1. MANUFACTURE THIS BOARD IN ACCORDANCE WITH IPC6012B CLASS 2 AND IPC-2221. | 4. APPLY SOLDERMASK (LPI OR EQUIVALENT) OVER BARE COPPER, MASK TO BE PER IPC-SM-840 TYPE B, CLASS2, COLOR GREEN. | 2. MATERIAL: EPOXY GLASS, NEMA GRADE FR4 (370-HR), RoHS AND WEEE COMPLIANT. | 6. THIS IS A CONTROL IMPEDANCE PCB. IT IS THE FABRICATORS RESPONSABILITY TO MEET SPECIFIED IMPEDANCE | 3. PCB HAS TO BE PRODUCED WITH PCB STACK-UP AND IMPEDANCES ACCORDING TO | 7. ELECTRICAL TEST: 100% CONTINUITY AND ISOLATION TEST REQUIRED FOR EACH FABRICATED PCB. | 9. HOLE SIZES ARE FINISHED (AFTER PLATING). STANDARD HOLE TOLERANCE IS +3MIL/-3MIL. | 5. SURFACE FINISH: ALL EXPOSED SURFACE LANDS TO BE ENIG WITH NI PLATING 3~8um Au PLATING 0.03~0.05um | STACK-UP IS DESCRIBED IN ATTACHED FILE. Flextronics  80211P CARRIER   4 LYR  .5 OZ .040 THICK.pdf | SECTIONS CROSSECTION CHART AND IMPEDANCE CONTROL (SEE DETAIL B). OVERALL BOARD THICKNESS 1MM +/-10% (SEE DETAIL A) | (SEE DETAIL B) WITH ACCURACY +/-10%. | SEE NOTE 11 | 01.27.2016 | Fab Drawing | DWG-00001382-001-PCB | B
User.10: 37.75 | 3.20 | 30.91 | R2 | 10.42 | 4.75 | 15 | 8 | 22.47 | dia | 4.90
User.11: J1 | TP5 | TP6 | TP04 | J3 | J2 | L2 | L3 | C20 | R7 | C21 | J4 | C17 | C18 | C19 | U1 | R4 | Q1 | C16 | R1 | L1 | C1 | R8 | R5 | R3 | C15 | R9 | R10 | 1 | 51 | 18 | 31 | 17 | 32 | 48 | 62 | 49 | A | B | E | F | C | D | 2 | 3 | 4 | 5 | CONTRACT NO: | APPROVAL: | DRAWN: | CHECKED: | ISSUED: | DATE: | 6 | 01.27.2016 | SCALE:  1:1 | SIZE | TITLE: | A3 | DWG NO: | 7 | (Innovation Lab Design) | SHEET:  1 OF 1 | 8 | REV: | Assembly Drawing | DWG-00001382-001-PCB
User.13: FIGURE | SIZE | 0.2 | 2.6 | DRILL CHART: TOP to BOTTOM | ALL UNITS ARE IN MILLIMETERS | TOLERANCE | +0.075/-0.075 | +0.15/-0.15 | PLATED | QTY | 724 | 2
